# Altium PCB dotkll.pcbdoc
Units mil, origin at the board's own origin, x right, y up, seen from the top; angles counter-clockwise.
Board outline 3498.74 x 2755.91 mil, 2 copper layers (Top Layer, Bottom Layer); 9 components, 7 nets, 141 pads, 0 vias.
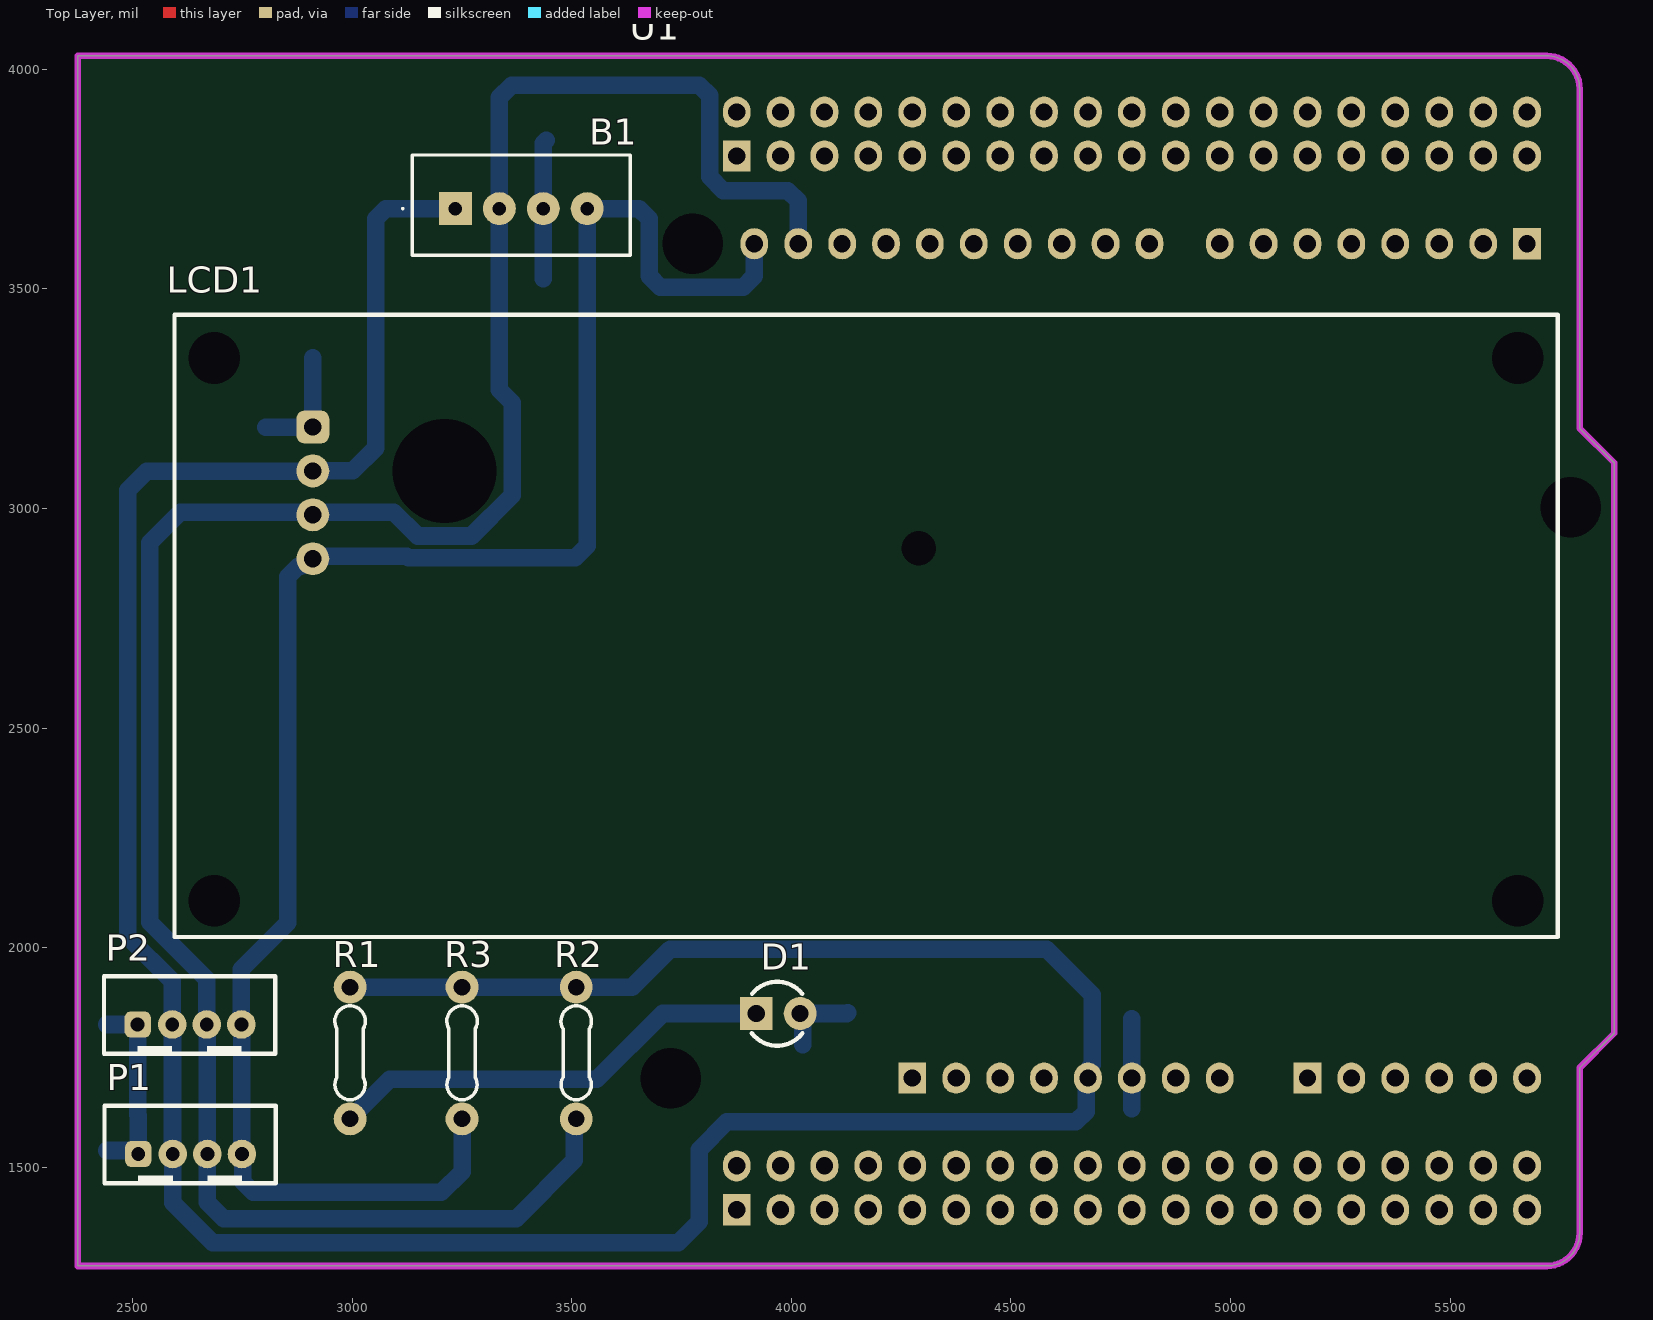
[diagram p0: Top Layer view]
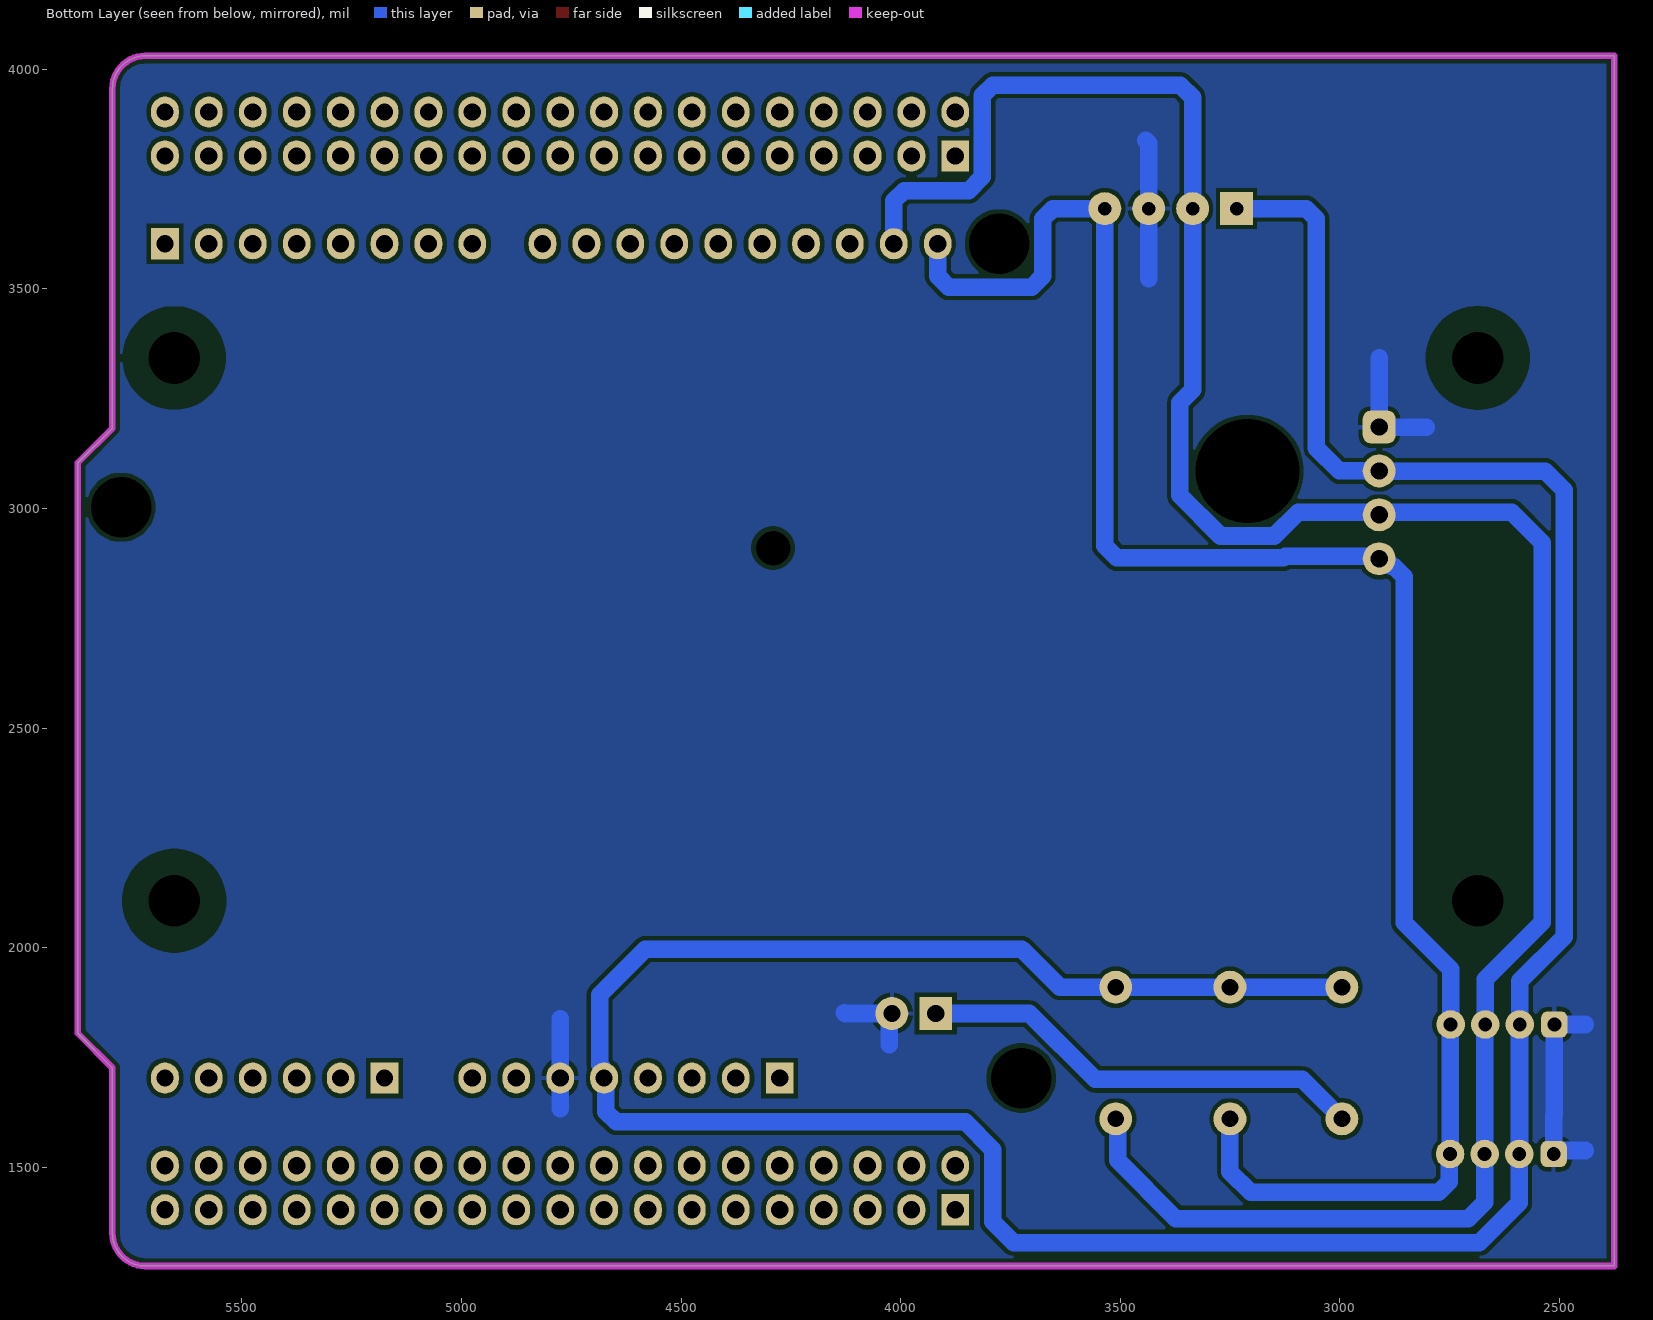
[diagram p1: Bottom Layer view, seen from below]
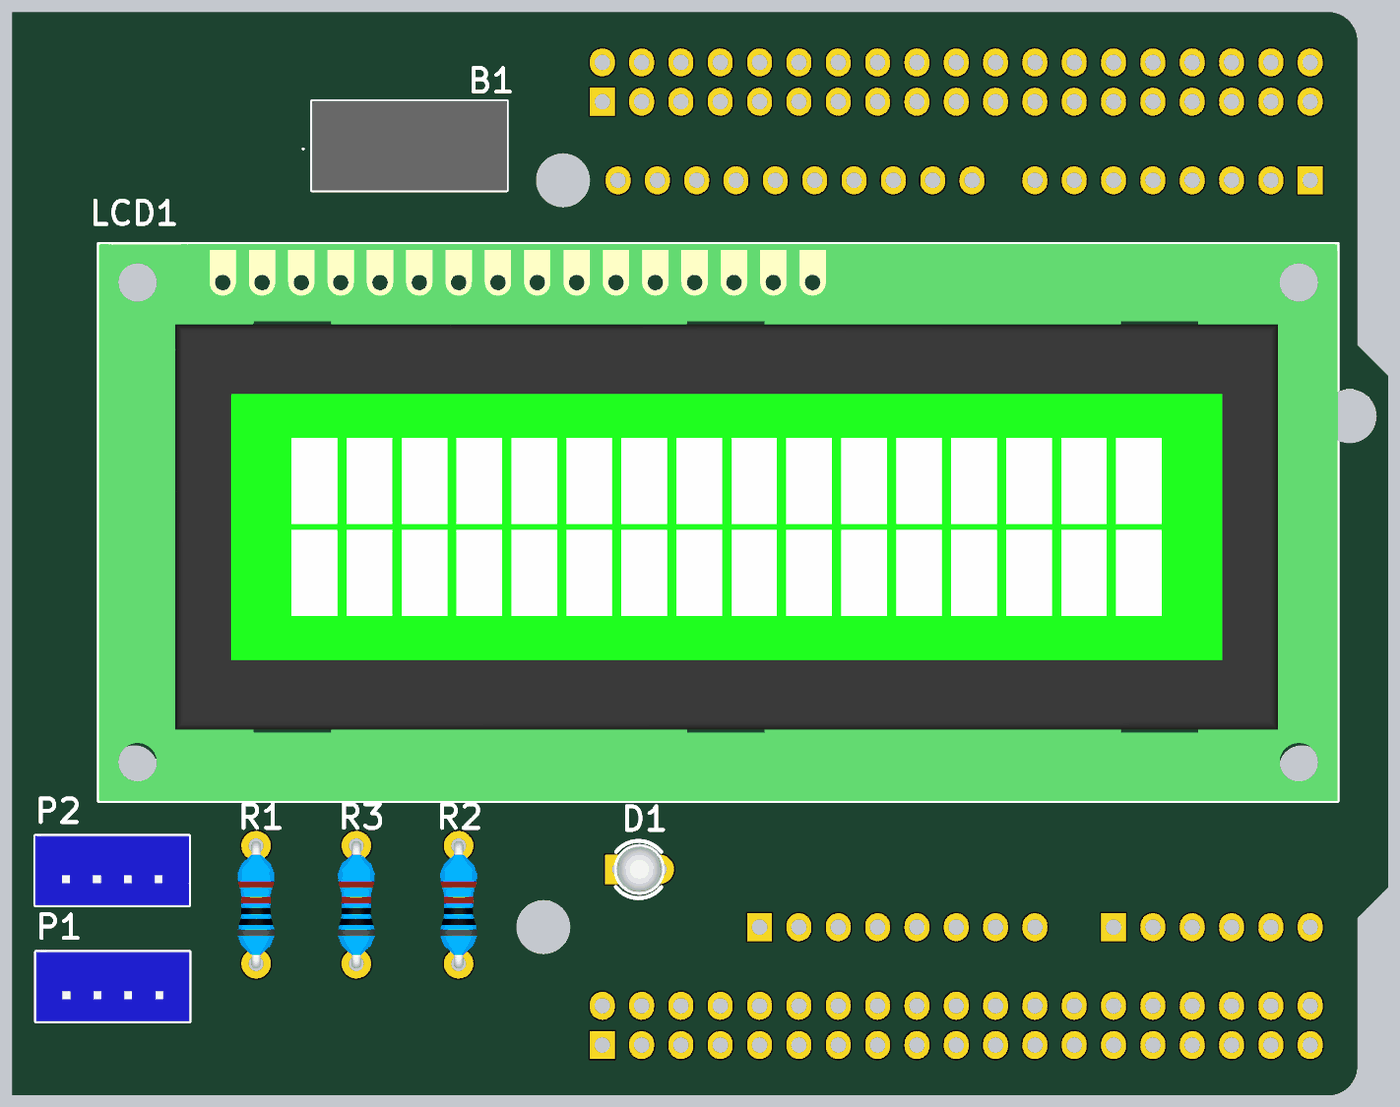
[diagram p2: 3D render of the assembled board from above, using the file's embedded part models]

## Layer stack, top to bottom
Top Solder: solder mask 0.4, Solder Resist, Dk 3.5
Top Layer: signal copper 1.4
Dielectric 1: dielectric 12.6, FR-4, Dk 4.8
Bottom Layer: signal copper 1.4
Bottom Solder: solder mask 0.4, Solder Resist, Dk 3.5

## Board outline
2375,1275 2375,4030.91 5720,4030.91 cw(c5720,3955.91) 5795,3955.91 5795,3182.87 5873.74,3104.13 5873.74,1804.92 5795,1726.18 5795,1350 cw(c5720,1350) 5720,1275

## Design rules (kind name [scope] priority, off if disabled: settings)
Clearance [All] p1: gap=10 ignorepadtopadclearanceinfootprint=FALSE
PolygonConnect [All] p1: connectstyle=Relief reliefconductorwidth=10 reliefentries=4 polygonreliefangle="90 Angle" airgapwidth=10
RoutingVias [All] p1: holewidth=28 width=50 viastyle="Through Hole" minholewidth=28 minwidth=50 maxholewidth=28 maxwidth=50
SolderMaskExpansion [All] p1: expansion=4 istentingtop=FALSE
Width [All] p1: maxlimit=50 minlimit=30 preferedwidth=40
30 further rules are at their usual default settings.

## Components (designator, comment, footprint, x,y, rotation, side; value= is the part's Value field where it differs from the comment)
B1 "DHT20" SEN18364 3235,3683 r0 top
D1 "Led" "LED 3MM - red" 3970,1850 r0 top
LCD1 "LCD 16x2" "LCD 1602A I2C" 4170,2719 r0 top
P1 "" HDR/Header/4/2mm/BOX 2630.63,1530 r0 top
P2 "Header 4" HDR/Header/4/2mm/BOX 2629.37,1825 r0 top
R1 "1k" "R 1/4W/300" 2995,1610 r90 top
R2 "4.7k" "R 1/4W/300" 3510,1610 r90 top
R3 "4.7k" "R 1/4W/300" 3250,1610 r90 top
U1 "NUCLEO-F103RB" NUCLEO 5795,1275 r90 top

## Footprints (in the part's own frame and the unit in brackets; to place one, negate y for a bottom-side part, rotate by r counter-clockwise, add the part's x,y. Pads: shape width x height; smd on the part's side, far side on the other; paste and mask are expansions set on the pad)
HDR/Header/4/2mm/BOX [mil]
  rrect50% 60x60 hole 31.5: 1(-118.11,0)
  round 65 hole 31.5: 2(-39.37,0) 3(39.37,0) 4(118.11,0)
  silkscreen extent -195,-67 195,110, body extent -195,-67 195,110, height 236
"LCD 1602A I2C" [mm]
  rrect50% 1.905x1.905 hole 1: 1(-32,11.85)
  round 1.905 hole 1: 2(-32,9.31) 3(-32,6.77) 4(-32,4.23)
  round 0 hole 6 unplated: HOLE(-24.38,9.31)
  round 0 hole 2 unplated: HOLE(3.06,4.85)
  round 0 hole 3 unplated: HOLG(37.7,-15.55) HOLH(-37.7,-15.55) HOLH(-37.7,15.85) HOLH(37.7,15.85)
  Top Layer pour cut-out: 34.7,15.85 34.928,14.702 35.579,13.729 36.552,13.078 37.7,12.85 37.7,12.85 38.848,13.078 39.821,13.729 40.472,14.702 40.7,15.85 40.7,15.85 40.472,16.998 39.821,17.971 38.848,18.622 37.7,18.85 37.7,18.85 36.552,18.622 35.579,17.971 34.928,16.998 34.7,15.85
  Top Layer pour cut-out: -40.7,15.85 -40.472,14.702 -39.821,13.729 -38.848,13.078 -37.7,12.85 -37.7,12.85 -36.552,13.078 -35.579,13.729 -34.928,14.702 -34.7,15.85 -34.7,15.85 -34.928,16.998 -35.579,17.971 -36.552,18.622 -37.7,18.85 -37.7,18.85 -38.848,18.622 -39.821,17.971 -40.472,16.998 -40.7,15.85
  Top Layer pour cut-out: -40.7,-15.55 -40.472,-16.698 -39.821,-17.671 -38.848,-18.322 -37.7,-18.55 -37.7,-18.55 -36.552,-18.322 -35.579,-17.671 -34.928,-16.698 -34.7,-15.55 -34.7,-15.55 -34.928,-14.402 -35.579,-13.429 -36.552,-12.778 -37.7,-12.55 -37.7,-12.55 -38.848,-12.778 -39.821,-13.429 -40.472,-14.402 -40.7,-15.55
  Top Layer pour cut-out: 34.7,-15.55 34.928,-16.698 35.579,-17.671 36.552,-18.322 37.7,-18.55 37.7,-18.55 38.848,-18.322 39.821,-17.671 40.472,-16.698 40.7,-15.55 40.7,-15.55 40.472,-14.402 39.821,-13.429 38.848,-12.778 37.7,-12.55 37.7,-12.55 36.552,-12.778 35.579,-13.429 34.928,-14.402 34.7,-15.55
  Bottom Layer pour cut-out: 34.7,15.85 34.928,14.702 35.579,13.729 36.552,13.078 37.7,12.85 37.7,12.85 38.848,13.078 39.821,13.729 40.472,14.702 40.7,15.85 40.7,15.85 40.472,16.998 39.821,17.971 38.848,18.622 37.7,18.85 37.7,18.85 36.552,18.622 35.579,17.971 34.928,16.998 34.7,15.85
  Bottom Layer pour cut-out: -40.7,15.85 -40.472,14.702 -39.821,13.729 -38.848,13.078 -37.7,12.85 -37.7,12.85 -36.552,13.078 -35.579,13.729 -34.928,14.702 -34.7,15.85 -34.7,15.85 -34.928,16.998 -35.579,17.971 -36.552,18.622 -37.7,18.85 -37.7,18.85 -38.848,18.622 -39.821,17.971 -40.472,16.998 -40.7,15.85
  Bottom Layer pour cut-out: -40.7,-15.55 -40.472,-16.698 -39.821,-17.671 -38.848,-18.322 -37.7,-18.55 -37.7,-18.55 -36.552,-18.322 -35.579,-17.671 -34.928,-16.698 -34.7,-15.55 -34.7,-15.55 -34.928,-14.402 -35.579,-13.429 -36.552,-12.778 -37.7,-12.55 -37.7,-12.55 -38.848,-12.778 -39.821,-13.429 -40.472,-14.402 -40.7,-15.55
  Bottom Layer pour cut-out: 34.7,-15.55 34.928,-16.698 35.579,-17.671 36.552,-18.322 37.7,-18.55 37.7,-18.55 38.848,-18.322 39.821,-17.671 40.472,-16.698 40.7,-15.55 40.7,-15.55 40.472,-14.402 39.821,-13.429 38.848,-12.778 37.7,-12.55 37.7,-12.55 36.552,-12.778 35.579,-13.429 34.928,-14.402 34.7,-15.55
  silkscreen extent -40,-17.65 40,18.35, body extent -40.61,-18.1 40.62,18.4, height 22
"LED 3MM - red" [mil]
  rect 75x75 hole 39: 1(-50,0)
  round 75 hole 39: 2(50,0)
  silkscreen extent -60,-73 55,72, body extent -66,-65 64,65, height 207
NUCLEO [mm]
  oval 1.8x1.6 hole 1: A5_1(59.13,24.88) A5_2(59.13,27.42) A5_3(59.13,29.96) A5_4(59.13,32.5) A5_5(59.13,35.04) A5_6(59.13,37.58) A5_7(59.13,40.12) A5_8(59.13,42.66) A5_9(59.13,45.2) A5_10(59.13,47.74) A6_2(10.87,36.06) A6_3(10.87,33.52) A6_4(10.87,30.98) A6_5(10.87,28.44) A6_6(10.87,25.9) A6_7(10.87,23.36) A6_8(10.87,20.82) A8_2(10.87,13.2) A8_3(10.87,10.66) A8_4(10.87,8.12) A8_5(10.87,5.58) A8_6(10.87,3.04) A9_2(59.13,5.58) A9_3(59.13,8.12) A9_4(59.13,10.66) A9_5(59.13,13.2) A9_6(59.13,15.74) A9_7(59.13,18.28) A9_8(59.13,20.82) M7_2(5.79,48.76) M7_3(3.25,46.22) M7_4(5.79,46.22) M7_5(3.25,43.68) M7_6(5.79,43.68) M7_7(3.25,41.14) M7_8(5.79,41.14) M7_9(3.25,38.6) M7_10(5.79,38.6) M7_11(3.25,36.06) M7_12(5.79,36.06) M7_13(3.25,33.52) M7_14(5.79,33.52) M7_15(3.25,30.98) M7_16(5.79,30.98) M7_17(3.25,28.44) M7_18(5.79,28.44) M7_19(3.25,25.9) M7_20(5.79,25.9) M7_21(3.25,23.36) M7_22(5.79,23.36) M7_23(3.25,20.82) M7_24(5.79,20.82) M7_25(3.25,18.28) M7_26(5.79,18.28) M7_27(3.25,15.74) M7_28(5.79,15.74) M7_29(3.25,13.2) M7_30(5.79,13.2) M7_31(3.25,10.66) M7_32(5.79,10.66) M7_33(3.25,8.12) M7_34(5.79,8.12) M7_35(3.25,5.58) M7_36(5.79,5.58) M7_37(3.25,3.04) M7_38(5.79,3.04) M10_2(66.75,48.76) M10_3(64.21,46.22) M10_4(66.75,46.22) M10_5(64.21,43.68) M10_6(66.75,43.68) M10_7(64.21,41.14) M10_8(66.75,41.14) M10_9(64.21,38.6) M10_10(66.75,38.6) M10_11(64.21,36.06) M10_12(66.75,36.06) M10_13(64.21,33.52) M10_14(66.75,33.52) M10_15(64.21,30.98) M10_16(66.75,30.98) M10_17(64.21,28.44) M10_18(66.75,28.44) M10_19(64.21,25.9) M10_20(66.75,25.9) M10_21(64.21,23.36) M10_22(66.75,23.36) M10_23(64.21,20.82) M10_24(66.75,20.82) M10_25(64.21,18.28) M10_26(66.75,18.28) M10_27(64.21,15.74) M10_28(66.75,15.74) M10_29(64.21,13.2) M10_30(66.75,13.2) M10_31(64.21,10.66) M10_32(66.75,10.66) M10_33(64.21,8.12) M10_34(66.75,8.12) M10_35(64.21,5.58) M10_36(66.75,5.58) M10_37(64.21,3.04) M10_38(66.75,3.04)
  rect 1.8x1.6 hole 1: A6_1(10.87,38.6) A8_1(10.87,15.74) A9_1(59.13,3.04) M7_1(3.25,48.76) M10_1(64.21,48.76)
  round 0 hole 3.5 unplated: HOLD(10.87,52.57) HOLD(43.89,0.5) HOLD(59.13,51.3)
  Keep-Out Layer lines w0.381: 0,86.868 0,1.905 ccw(c1.905,1.905) 1.905,0 11.46,0 13.46,-2 46.46,-2 48.46,0 68.095,0 ccw(c68.095,1.905) 70,1.905 70,86.868 0,86.868
"R 1/4W/300" [mil] "Through hole resitor, axial 300mils, 1/4W"
  round 75 hole 38: 1(0,0) 2(300,0)
  silkscreen extent 44,-35 257,35, body extent -12,-47 312,47, height 97
SEN18364 [mm]
  rect 1.905x1.905 hole 0.78: 1(0,0)
  round 1.905 hole 0.78: 2(2.54,0) 3(5.08,0) 4(7.62,0)
  silkscreen extent -3.1,-2.7 10.11,3.1, body extent -10,-3.38 10,3.38, height 5.8

## Part data
B1: library part SEN-18364, "Multiple Function Sensor Modules Humidity and Temperature Sensor - DHT20", Manufacturer_Name=SparkFun, Mouser Part Number=474-SEN-18364, Datasheet Link=https://cdn.sparkfun.com/assets/8/a/1/5/0/DHT20.pdf, Geometry.Height=16.3mm, Manufacturer_Part_Number=SEN-18364, Mouser Price/Stock=https://www.mouser.co.uk/ProductDetail/SparkFun/SEN-18364?qs=QNEnbhJQKvbVltiDzPDFyg%3D%3D
D1: "Typical LED"
LCD1: "Character LCD 16x2"
P1: library part "Header 4", "Header, 4-Pin"
P2: "Header, 4-Pin"
R1 R2 R3: library part Resistor, "Resistor"
U1: "STM32F103RB, mbed-Enabled Development Nucleo-64 STM32F1 ARM® Cortex®-M3 MCU 32-Bit Embedded Evaluation Board", Manufacturer=STMicroelectronics, BRAND=STMicroelectronics, Manufacturer Product Number=NUCLEO-F103RB, PART NO=NUCLEO-F103RB, STOCK CODE=497-14362-ND, SUPPLIER=digi-key, TYPE="EVAL BRD"

## Nets (pads, with @x,y where several pads share a name; then routed paths per layer and width w, separated by ;. In a path a pad name is that pad's centre, name@x,y a point inside that pad or via, vN(x,y) a via of type N, cw(c..) or ccw(c..) an arc to the next point about the centre after c; other vN are vias at no path point)
+VCC: B1.1 LCD1.2 P1.2 P2.2 R1.2 R2.2 R3.2 U1.A6_5 | length 7376.8
  Bottom Layer w40: P2.2 2590,1924 2489,2025 2489,3042 2531.84,3084.84 LCD1.2@2926.33,3084.84 ; P2.2@2590.63,1824.37 2590.63,1530.63 P1.2 2591.26,1418.74 2682,1328 3742.57,1328 3790,1375.43 3790,1540 3853.1,1603.1 4648.07,1603.1 4671.5,1626.53 4671.5,1699.14 4679.71,1707.35 4679.71,1727.55 4685.36,1733.2 4685.36,1892.64 4581.36,1996.64 3723.64,1996.64 3637,1910 R2.2 R3.2 R1.2 ; LCD1.2 3000.7,3085.54 3053,3137.84 3053,3659.57 3076.43,3683 B1.1
GND: B1.3 D1.2 LCD1.1 P1.1 P2.1 U1.A6_6 | length 1412.6
  Bottom Layer w40: 2440.83,1825 P2.1 2511.26,1618.78 2512.52,1617.52 P1.1 2504.52,1538 2441,1538 ; 2802.46,3185.54 LCD1.1 2910.16,3342.79 ; 3435,3523 B1.3 3435,3832 3442,3839 ; 4026,1779 4026,1844 D1.2 4126,1850 4128,1852 ; 4775.31,1632.68 U1.A6_6 4775.31,1838.32
NetD1_1: D1.1 R1.1 | length 1024.4
  Bottom Layer w40: R1.1 3085,1700 3557,1700 3707,1850 D1.1
SCL: B1.4 LCD1.4 P1.4 P2.4 R3.1 U1.A5_10 | length 4142.8
  Bottom Layer w40: LCD1.4 2900.69,2885.54 2883.19,2868.04 2876.84,2868.04 2853.4,2844.6 2853.4,2056.4 2747.48,1950.48 P2.4 2748.11,1824.37 2748.11,1530.63 2750.99,1527.75 2750.99,1466.43 2774.42,1443 3203,1443 3250,1490 R3.1 ; LCD1.4@2934.03,2890.4 2935.16,2891.54 3123.99,2891.54 3128.1,2887.43 3507.46,2887.43 3535,2914.97 B1.4 3652.99,3683 3676.42,3659.57 3676.42,3529.43 3701.79,3504.06 3890.1,3504.06 3915.47,3529.43 U1.A5_10
SDA: B1.2 LCD1.3 P1.3 P2.3 R2.1 U1.A5_9 | length 5398.1
  Bottom Layer w40: P1.3@2669.37,1530 2669.37,1824.37 P2.3 2668.74,1928.26 2539,2058 2539,2922 2608.54,2991.54 3094.7,2991.54 3148.81,2937.43 3271.51,2937.43 3364,3029.92 3364,3241 3335,3270 B1.2 3335,3936 3363,3964 3790.39,3964 3813.82,3940.57 3813.82,3755.09 3844.91,3724 3992.04,3724 4015.47,3700.57 U1.A5_9 ; P1.3 2669.97,1420.03 2707,1383 3373,1383 3505.79,1515.79 3505.79,1605.79 R2.1
UART_RX: U1.A9_1
UART_TX: U1.A9_2
pads on no net: LCD1.HOLE LCD1.HOLG LCD1.HOLH U1.A5_1 U1.A5_2 U1.A5_3 U1.A5_4 U1.A5_5 U1.A5_6 U1.A5_7 U1.A5_8 U1.A6_1 U1.A6_2 U1.A6_3 U1.A6_4 U1.A6_7 U1.A6_8 U1.A8_1 U1.A8_2 U1.A8_3 U1.A8_4 U1.A8_5 U1.A8_6 U1.A9_3 U1.A9_4 U1.A9_5 U1.A9_6 U1.A9_7 U1.A9_8 U1.HOLD U1.M7_1 U1.M7_2 U1.M7_3 U1.M7_4 U1.M7_5 U1.M7_6 U1.M7_7 U1.M7_8 U1.M7_9 U1.M7_10 U1.M7_11 U1.M7_12 U1.M7_13 U1.M7_14 U1.M7_15 U1.M7_16 U1.M7_17 U1.M7_18 U1.M7_19 U1.M7_20 U1.M7_21 U1.M7_22 U1.M7_23 U1.M7_24 U1.M7_25 U1.M7_26 U1.M7_27 U1.M7_28 U1.M7_29 U1.M7_30 U1.M7_31 U1.M7_32 U1.M7_33 U1.M7_34 U1.M7_35 U1.M7_36 U1.M7_37 U1.M7_38 U1.M10_1 U1.M10_2 U1.M10_3 U1.M10_4 U1.M10_5 U1.M10_6 U1.M10_7 U1.M10_8 U1.M10_9 U1.M10_10 U1.M10_11 U1.M10_12 U1.M10_13 U1.M10_14 U1.M10_15 U1.M10_16 U1.M10_17 U1.M10_18 U1.M10_19 U1.M10_20 U1.M10_21 U1.M10_22 U1.M10_23 U1.M10_24 U1.M10_25 U1.M10_26 U1.M10_27 U1.M10_28 U1.M10_29 U1.M10_30 U1.M10_31 U1.M10_32 U1.M10_33 U1.M10_34 U1.M10_35 U1.M10_36 U1.M10_37 U1.M10_38

## Polygon pours and split planes (outlines as drawn)
GND on Bottom Layer "GND_L02_P000" (solid, remove dead copper, pour order 0): 2374,4031 2375,4030 5745,4030 5795,3980 5795,3182 5873,3104 5874,3104 5874,1804 5795,1725 5795,1330 5740,1275 2376,1275 2373,1278 2373,4030